# EAGLE board thermocouple-sensor (EAGLE 5.01)
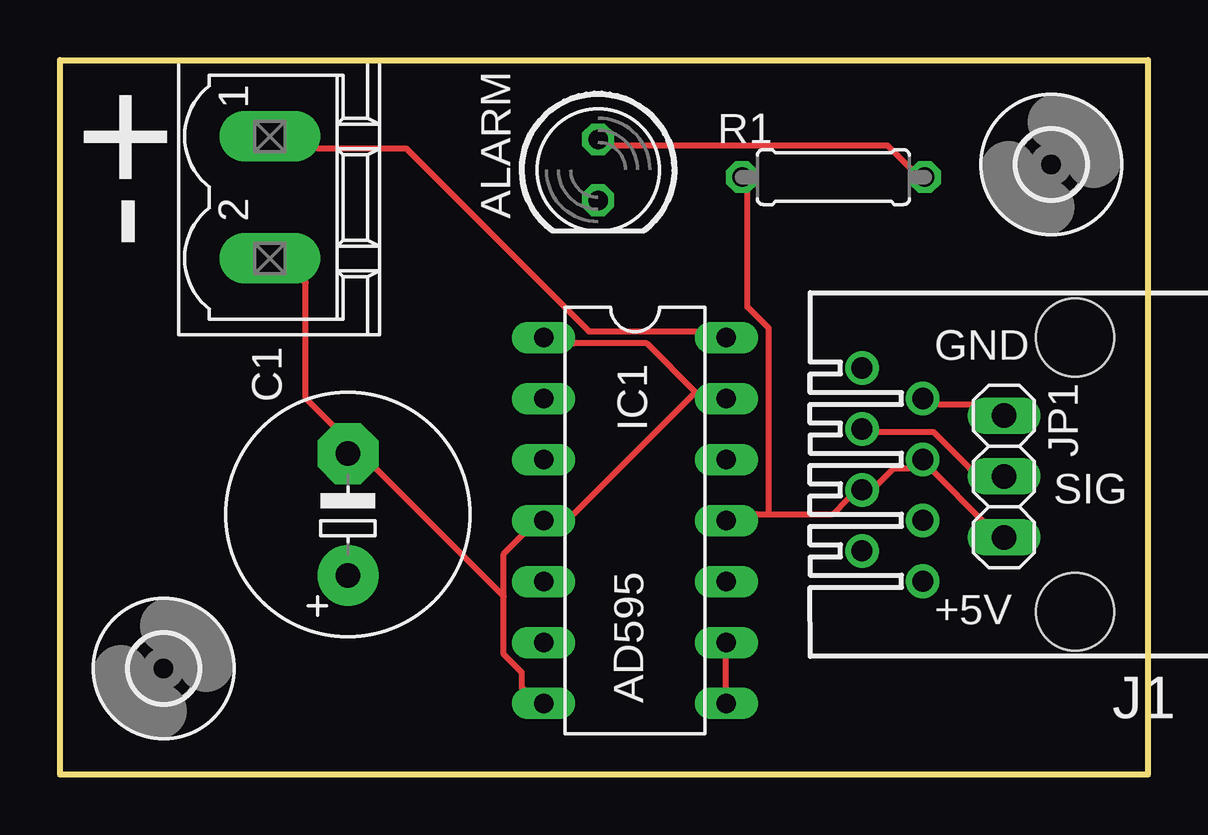
[diagram p0: board, top side]
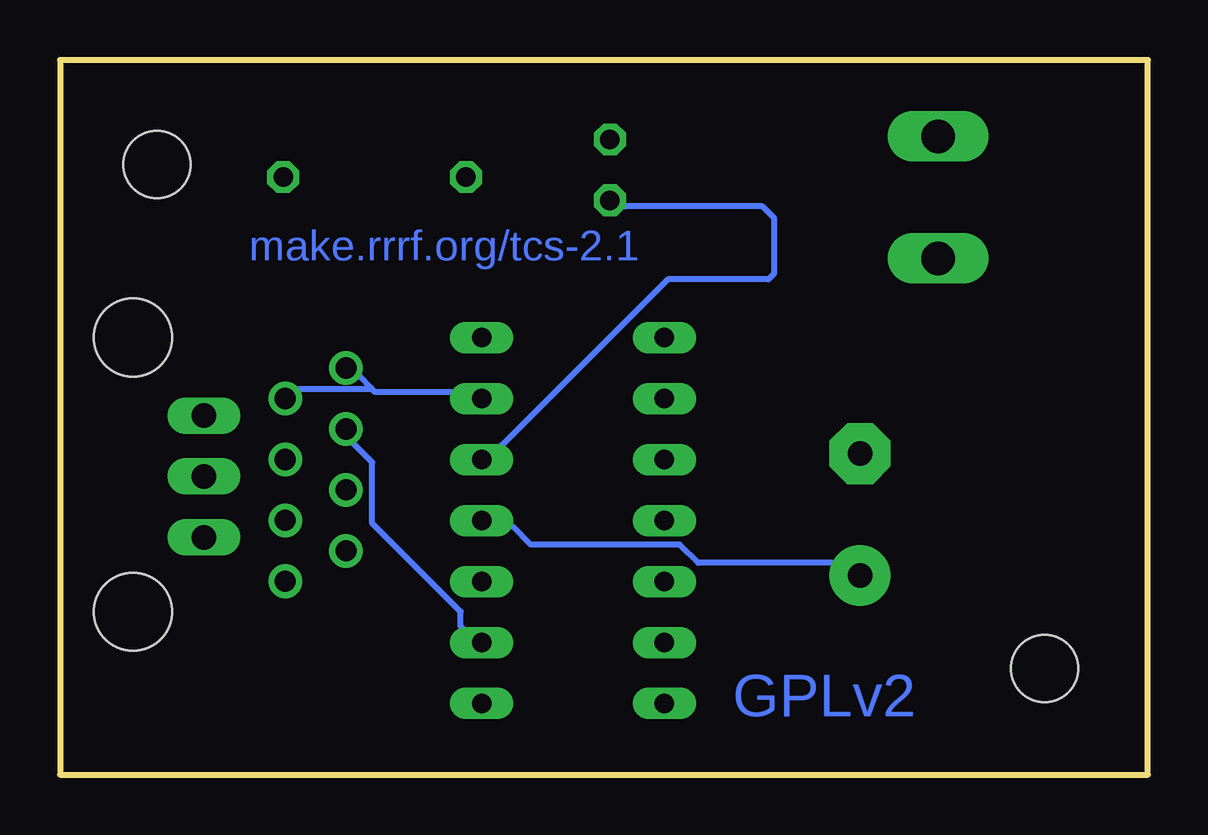
[diagram p1: board, bottom side, seen from below]

Size 45.35 x 29.78 mm. Coordinates in mm from the lower left corner, seen from the top.
Outline: 0,29.78 45.35,29.78 45.35,0 0,0 0,29.78
Copper layers (1*16): Top 0.035mm / dielectric 1.5mm / Bottom 0.035mm
Design rules "default": minimum track width 10mil, minimum drill 24mil, track to track 8mil, track to pad 8mil, pad to pad 8mil, via to via 8mil, smd to smd 8mil, copper to edge 40mil, drill to drill 8mil, minimum pad ring 10mil, minimum via ring 8mil, stop-mask expansion 4mil, vias tented up to drill 0mil, thermal gap 10mil

## Footprints (pad centres in the part's own frame; a part is rotated, then mirrored left to right if it is on the bottom)
LED5MM = drill 0.813 octagon: A -1.27,0; K 1.27,0
E5-10,5 = drill 1.016 pad 2.54 round: + -2.54,0 | drill 1.016 pad 2.54 octagon: - 2.54,0
DIL14 = drill 0.813 long: 1 -7.62,-3.81; 2 -5.08,-3.81; 3 -2.54,-3.81; 4 0,-3.81; 5 2.54,-3.81; 6 5.08,-3.81; 7 7.62,-3.81; 8 7.62,3.81; 9 5.08,3.81; 10 2.54,3.81; 11 0,3.81; 12 -2.54,3.81; 13 -5.08,3.81; 14 -7.62,3.81
520426-4 = drill 0.889 round: 1 -4.445,6.35; 2 -3.175,8.89; 3 -1.905,6.35; 4 -0.635,8.89; 5 0.635,6.35; 6 1.905,8.89; 7 3.175,6.35; 8 4.445,8.89 | hole 3.251: -5.715,0; 5.715,0
1X03 = drill 1.016 long: 1 -2.54,0; 2 0,0; 3 2.54,0
0207/7 = drill 0.813 octagon: 1 -3.81,0; 2 3.81,0
2,8 = hole 2.8: 0,0
MSTBV2 = drill 1.397 long: 1 -2.54,0; 2 2.54,0

## Placement (x,y rotation side)
ALARM  RED  [LED5MM]  22.43,25.2 270 top
C1  100uF  [E5-10,5]  12,10.84 90 top
IC1  [DIL14]  23.97,10.59 270 top
J1  [520426-4]  42.32,12.51 90 top
JP1  [1X03]  39.35,12.43 270 top
R1  330  [0207/7]  32.24,24.9 180 top
U$2  [2,8]  4.32,4.43 0 top
U$3  [2,8]  41.32,25.43 0 top
X1  MST2V  [MSTBV2]  8.75,24.06 270 top

## Library data of the parts
ALARM = led
C1 R1 = rcl
IC1 = analog-devices
J1 = con-amp
JP1 = pinhead
U$2 U$3 = holes
X1 = con-phoenix-508

## Nets
GND: C1.- IC1.1 IC1.4 IC1.7 IC1.13 J1.7 J1.8 JP1.1 X1.2
N$1: ALARM.A R1.1
N$2: ALARM.K IC1.12
N$3: IC1.14 X1.1
N$5: IC1.8 IC1.9 J1.6 JP1.2
VCC: C1.+ IC1.11 J1.4 J1.5 JP1.3 R1.2

## Tracks (layer width: path | path; a pad name or v marks a point on that pad's centre or on a via)
GND
  Top 0.254: X1.2 10.24,20.51 10.24,15.68 11.38,14.54 C1.- 13.16,12.76 18.5,7.43 | 18.5,7.43 18.5,9.21 19.26,9.97 IC1.4 21.42,10.86 26.5,15.94 | 18.5,7.43 18.5,5.02 19.26,4.25 19.26,3.62 IC1.7 | J1.7 36.66,15.43 38.05,15.43 JP1.1 | 26.5,15.94 24.46,17.97 21.42,17.97 IC1.1 | 26.5,15.94 IC1.13
  Bottom 0.254: 32.4,16.13 32.85,16.57 J1.8 | 32.4,16.13 32.21,15.94 29.04,15.94 IC1.13 | J1.7 35.39,16.07 32.46,16.07 32.4,16.13
N$1
  Top 0.254: ALARM.A 23.07,26.23 34.5,26.23 35.51,25.21 R1.1
N$2
  Bottom 0.254: IC1.12 26.88,13.78 20.02,20.64 15.83,20.64 15.57,20.89 15.57,23.18 16.08,23.69 21.8,23.69 ALARM.K
N$3
  Top 0.254: IC1.14 26.5,18.48 22.05,18.48 14.43,26.1 10.75,26.1 X1.1
N$5
  Top 0.254: IC1.8 27.77,3.62 27.77,4.89 IC1.9 | J1.6 34.12,14.29 36.4,14.29 37.93,12.76 JP1.2
  Bottom 0.254: IC1.9 28.66,6.16 28.66,6.79 32.34,10.48 32.34,13.02 33.1,13.78 J1.6
VCC
  Top 0.254: JP1.3 38.43,10.6 36.4,12.64 J1.5 35.39,12.76 34.75,12.76 34.12,12.13 J1.4 32.85,11.49 32.21,10.86 29.54,10.86 | 29.54,10.86 29.04,10.86 IC1.11 | 29.54,10.86 29.54,18.61 28.66,19.49 28.66,24.32 R1.2
  Bottom 0.254: C1.+ 13.16,8.83 18.75,8.83 19.51,9.59 25.73,9.59 26.5,10.35 IC1.11

## Text on the board
Bottom: make.rrrf.org/tcs-2.1 | GPLv2
tPlace: - | + | GND | SIG | +5V | AD595